# EAGLE board HiHat (EAGLE 6.4)
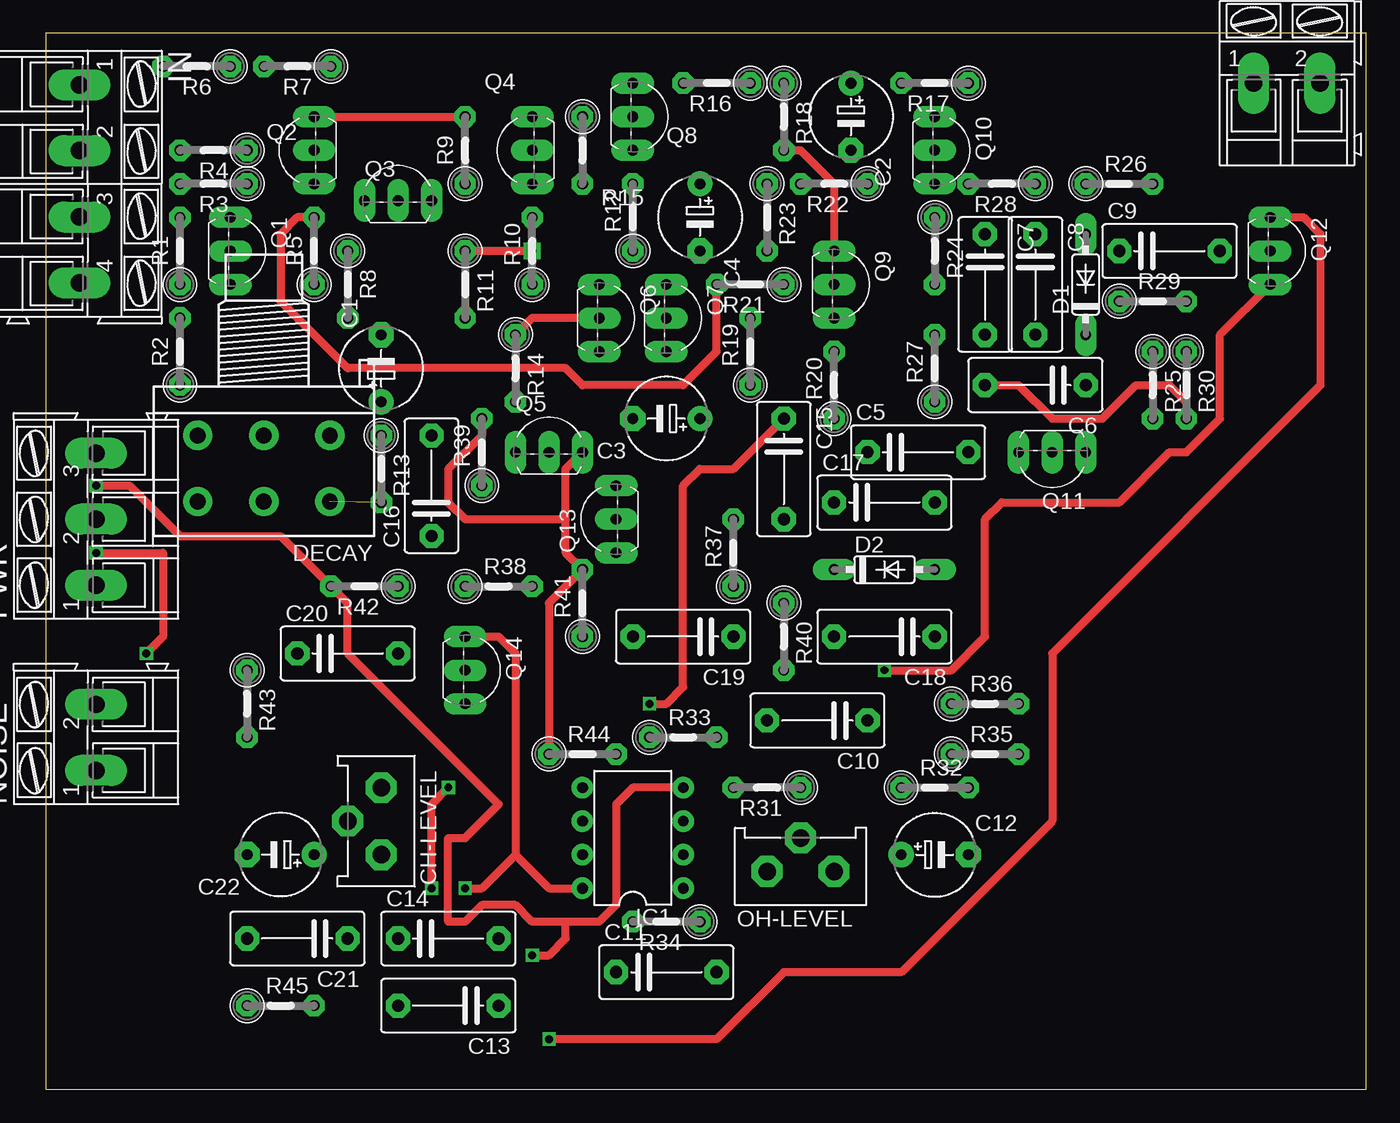
[diagram p0: board, top side]
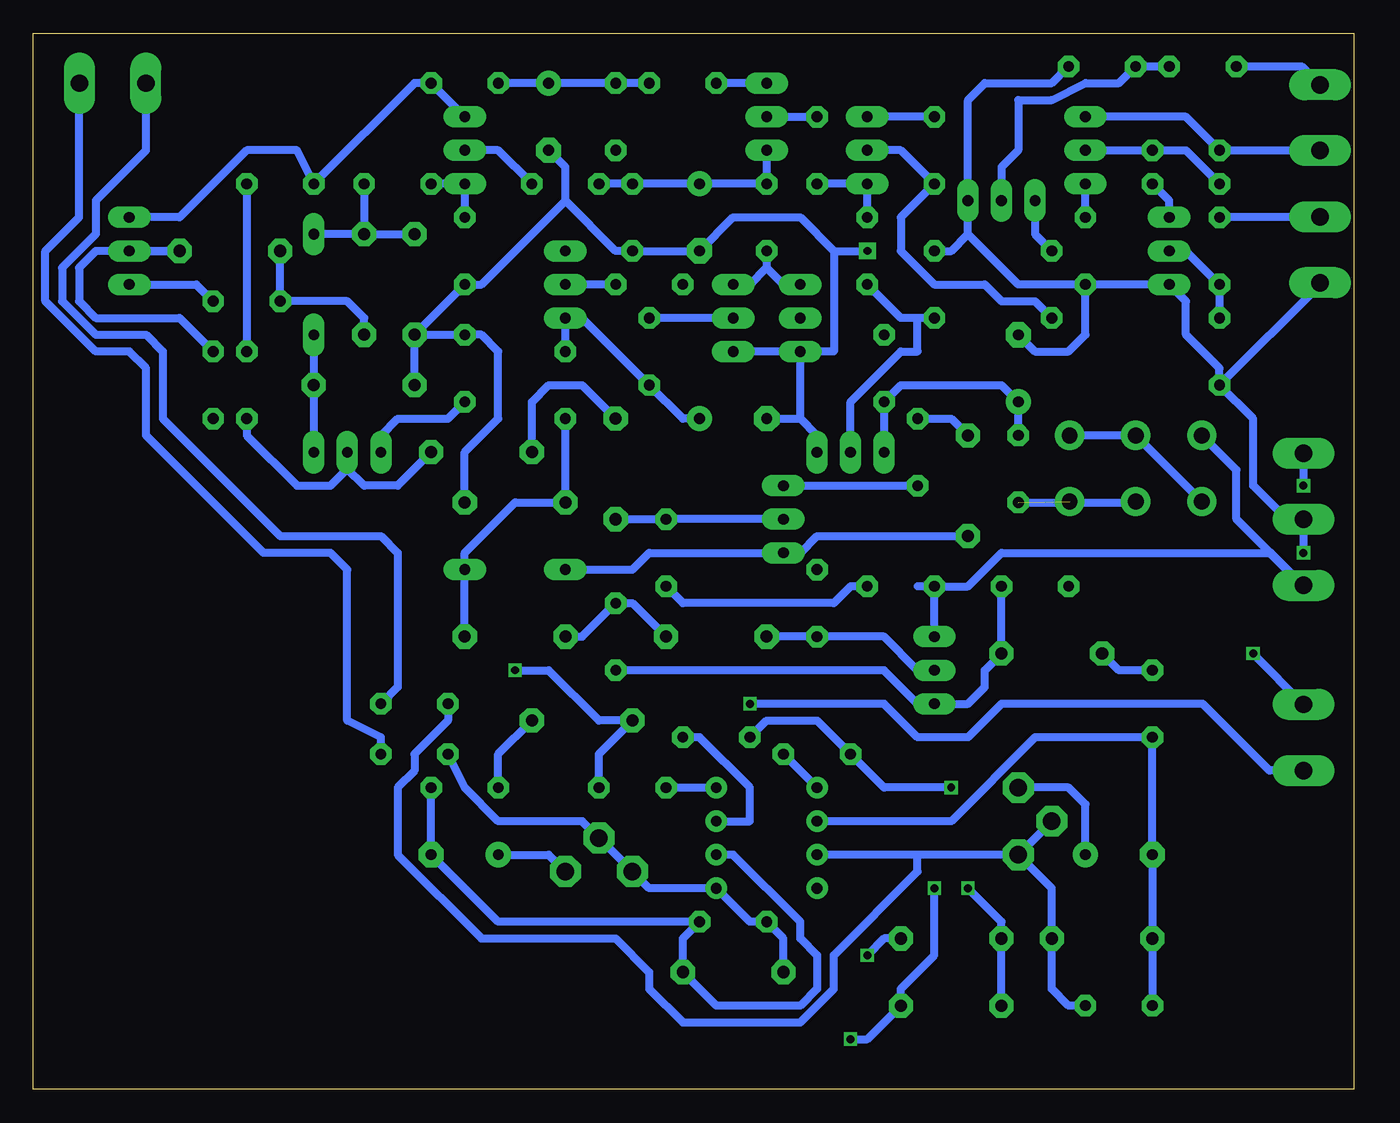
[diagram p1: board, bottom side, seen from below]

Size 100 x 80 mm. Coordinates in mm from the lower left corner, seen from the top.
Outline: 0,0 100,0 100,80 0,80 0,0
Copper layers (1*16): Top 0.035mm / dielectric 1.5mm / Bottom 0.035mm
Design rules "default *": minimum track width 10mil, minimum drill 24mil, track to track 8mil, track to pad 8mil, pad to pad 8mil, via to via 8mil, smd to smd 8mil, copper to edge 40mil, drill to drill 8mil, minimum pad ring 10mil, minimum via ring 8mil, stop-mask expansion 4mil, vias tented up to drill 0mil, thermal gap 10mil

## Footprints (pad centres in the part's own frame; a part is rotated, then mirrored left to right if it is on the bottom)
E5-6 = drill 0.813 pad 1.905: + -2.54,0 | drill 0.813 pad 1.905 octagon: - 2.54,0
C075-042X103 = drill 0.914 octagon: 1 -3.81,0; 2 3.81,0
ECP10P = drill 1.321 octagon: A -2.54,0; E 2.54,0; S 0,2.54
DO35-7 = drill 0.813 long: A 3.81,0; C -3.81,0
3RP/1610G = drill 1.2 pad 2.184: 1-1 -5,0; 1-2 0,0; 1-3 5,0; 2-1 -5,5; 2-2 0,5; 2-3 5,5
DIL08 = drill 0.813 pad 1.27: 1 -3.81,-3.81; 2 -1.27,-3.81; 3 1.27,-3.81; 4 3.81,-3.81; 5 3.81,3.81; 6 1.27,3.81; 7 -1.27,3.81; 8 -3.81,3.81
AK300/4 = drill 1.321 long: 1 -7.493,0; 2 -2.515,0; 3 2.515,0; 4 7.493,0
AK300/2 = drill 1.321 long: 1 -2.515,0; 2 2.489,0
AK300/3 = drill 1.321 long: 1 -5.004,0; 2 0,0; 3 5.004,0
TO92-EBC = drill 0.813 long: B 0,-1.27; C -2.54,-1.27; E 2.54,-1.27
0207/5V = drill 0.813 octagon: 1 -2.54,0; 2 2.54,0

## Placement (x,y rotation side)
C1  10u/16v  [E5-6]  25.4,54.61 90 top
C2  47u/16v  [E5-6]  60.96,73.66 270 top
C3  0.47u  [E5-6]  46.99,50.8 180 top
C4  0.47u  [E5-6]  49.53,66.04 270 top
C5  22n  [C075-042X103]  66.04,48.26 0 top
C6  1.5n  [C075-042X103]  74.93,53.34 180 top
C7  1.5n  [C075-042X103]  71.12,60.96 270 top
C8  1.5n  [C075-042X103]  74.93,60.96 270 top
C9  1.5n  [C075-042X103]  85.09,63.5 0 top
C10  470p  [C075-042X103]  58.42,27.94 180 top
C11  220p  [C075-042X103]  46.99,8.89 0 top
C12  33u/6.3v  [E5-6]  67.31,17.78 0 top
C13  0.1u  [C075-042X103]  30.48,6.35 180 top
C14  0.1u  [C075-042X103]  30.48,11.43 0 top
C15  22n  [C075-042X103]  55.88,46.99 270 top
C16  1.5n  [C075-042X103]  29.21,45.72 90 top
C17  1.5n  [C075-042X103]  63.5,44.45 0 top
C18  1.5n  [C075-042X103]  63.5,34.29 180 top
C19  1.5n  [C075-042X103]  48.26,34.29 180 top
C20  470p  [C075-042X103]  22.86,33.02 0 top
C21  220p  [C075-042X103]  19.05,11.43 180 top
C22  33u/6.3v  [E5-6]  17.78,17.78 180 top
CH-LEVEL  100k  [ECP10P]  25.4,20.32 90 top
D1  1N4148  [DO35-7]  78.74,60.96 90 top
D2  1N4148  [DO35-7]  63.5,39.37 0 top
DECAY  1M  [3RP/1610G]  16.51,49.53 180 top
IC1  TL072P  [DIL08]  44.45,19.05 90 top
IN  OH-TRIG, ACC, CH-TRIG  [AK300/4]  2.54,68.58 270 top
NOISE  [AK300/2]  3.81,26.67 90 top
OH-LEVEL  100k  [ECP10P]  57.15,16.51 0 top
OUT  [AK300/2]  93.98,76.2 0 top
PWR  +15V, GND, -15V  [AK300/3]  3.81,43.18 90 top
Q1  BC546A  [TO92-EBC]  15.24,63.5 270 top
Q2  BC556A  [TO92-EBC]  19.05,71.12 90 top
Q3  BC546A  [TO92-EBC]  26.67,68.58 0 top
Q4  BC556A  [TO92-EBC]  35.56,71.12 90 top
Q5  BC546A  [TO92-EBC]  38.1,49.53 0 top
Q6  BC546A  [TO92-EBC]  43.18,58.42 270 top
Q7  BC546A  [TO92-EBC]  48.26,58.42 270 top
Q8  BC546A  [TO92-EBC]  45.72,73.66 270 top
Q9  BC546A  [TO92-EBC]  60.96,60.96 270 top
Q10  BC546A  [TO92-EBC]  68.58,71.12 270 top
Q11  BC546A  [TO92-EBC]  76.2,46.99 180 top
Q12  BC546A  [TO92-EBC]  93.98,63.5 270 top
Q13  BC546A  [TO92-EBC]  41.91,43.18 90 top
Q14  BC546A  [TO92-EBC]  33.02,31.75 270 top
R1  22k  [0207/5V]  10.16,63.5 90 top
R2  10k  [0207/5V]  10.16,55.88 90 top
R3  22k  [0207/5V]  12.7,68.58 180 top
R4  4.7k  [0207/5V]  12.7,71.12 180 top
R5  22k  [0207/5V]  20.32,63.5 90 top
R6  22k  [0207/5V]  11.43,77.47 180 top
R7  10k  [0207/5V]  19.05,77.47 180 top
R8  22k  [0207/5V]  22.86,60.96 270 top
R9  4.7k  [0207/5V]  31.75,71.12 90 top
R10  22k  [0207/5V]  36.83,63.5 90 top
R11  10k  [0207/5V]  31.75,60.96 270 top
R12  100k  [0207/5V]  44.45,66.04 90 top
R13  100k  [0207/5V]  25.4,46.99 270 top
R14  10k  [0207/5V]  35.56,54.61 270 top
R15  10k  [0207/5V]  40.64,71.12 270 top
R16  470  [0207/5V]  50.8,76.2 180 top
R17  100  [0207/5V]  67.31,76.2 180 top
R18  470  [0207/5V]  55.88,73.66 270 top
R19  330k  [0207/5V]  53.34,55.88 90 top
R20  33k  [0207/5V]  59.69,53.34 90 top
R21  33k  [0207/5V]  53.34,60.96 180 top
R22  33k  [0207/5V]  59.69,68.58 180 top
R23  1M  [0207/5V]  54.61,66.04 270 top
R24  33k  [0207/5V]  67.31,63.5 270 top
R25  1M  [0207/5V]  83.82,53.34 270 top
R26  1M  [0207/5V]  81.28,68.58 0 top
R27  100  [0207/5V]  67.31,54.61 90 top
R28  33k  [0207/5V]  72.39,68.58 180 top
R29  2.7k  [0207/5V]  83.82,59.69 0 top
R30  69k  [0207/5V]  86.36,53.34 270 top
R31  22k  [0207/5V]  54.61,22.86 180 top
R32  39k  [0207/5V]  67.31,22.86 0 top
R33  47k  [0207/5V]  48.26,26.67 0 top
R34  470k  [0207/5V]  46.99,12.7 180 top
R35  1k  [0207/5V]  71.12,25.4 0 top
R36  1k  [0207/5V]  71.12,29.21 0 top
R37  1M  [0207/5V]  52.07,40.64 90 top
R38  1M  [0207/5V]  34.29,38.1 0 top
R39  100  [0207/5V]  33.02,48.26 90 top
R40  2.7k  [0207/5V]  55.88,34.29 270 top
R41  69k  [0207/5V]  40.64,36.83 90 top
R42  22k  [0207/5V]  24.13,38.1 180 top
R43  39k  [0207/5V]  15.24,29.21 270 top
R44  47k  [0207/5V]  40.64,25.4 0 top
R45  470k  [0207/5V]  17.78,6.35 0 top

## Library data of the parts
C1-C22 R1-R45 = rcl
CH-LEVEL DECAY OH-LEVEL = pot
D1 D2 = diode
IC1 = linear
IN NOISE OUT PWR = con-ptr500; OC_FARNELL: unknown; OC_NEWARK: unknown
Q1 Q3 Q5-Q14 = transistor-npn
Q2 Q4 = transistor-pnp

## Nets
+15V: C13.1 DECAY.1-3 IC1.8 PWR.1 Q10.C Q12.C Q14.C R17.1 R26.1 R38.1
-15V: C14.2 IC1.4 PWR.3 R31.2 R42.2
GND: C1.- C2.- C3.- C4.- C6.2 C7.2 C13.2 C14.1 C16.2 C17.2 IN.4 NOISE.2 PWR.2 Q1.E Q3.E Q5.E Q6.E Q7.E R2.1 R5.1 R7.1 R11.1 R23.2 R24.2 R27.2 R30.2 R33.1 R39.2 R41.2 R44.1
N$1: IN.3 R1.2
N$2: Q1.B R1.1 R2.2
N$3: IN.2 Q2.E Q4.E R4.2 R9.2
N$4: Q2.B R3.2 R4.1
N$5: Q1.C R3.1
N$6: Q3.B R6.1 R7.2
N$7: Q2.C R5.2 R21.2
N$8: IN.1 R6.2
N$9: Q3.C R8.1
N$10: Q5.B R10.1 R11.2
N$11: Q4.B R8.2 R9.1
N$12: Q4.C R10.2 R15.2
N$13: DECAY.1-1 DECAY.1-2 DECAY.2-3
N$14: Q6.B R14.1
N$15: Q8.B R15.1
N$16: C2.+ R16.1 R17.2 R18.1
N$17: C1.+ Q5.C R13.1 R14.2
N$18: C4.+ Q8.E R12.2 R22.2 R23.1
N$19: Q6.C Q7.C R12.1
N$20: Q8.C R16.2
N$21: Q7.B R19.2
N$22: C3.+ Q9.E R19.1 R20.2
N$23: R25.1 R26.2
N$24: Q9.B R21.1
N$25: C5.2 Q11.B R25.2
N$26: Q9.C R18.2
N$27: Q10.B R22.1
N$28: Q10.E R24.1 R28.2
N$29: Q11.E R27.1
N$30: C6.1 D1.C Q11.C
N$31: C7.1 C8.1 D1.A R28.1
N$32: C11.2 C12.- IC1.2 R32.2 R34.1
N$33: C8.2 C9.1 R29.1
N$34: C9.2 Q12.B R30.1
N$35: C10.2 Q12.E R29.2 R31.1
N$36: C10.1 R32.1
N$37: IC1.3 R33.2
N$38: OUT.2 R35.2
N$39: C12.+ OH-LEVEL.E
N$40: C11.1 IC1.1 OH-LEVEL.A OH-LEVEL.S R34.2 R35.1
N$41: R37.1 R38.2
N$42: C15.2 Q13.B R37.2
N$43: Q13.E R39.1
N$44: C16.1 D2.C Q13.C
N$45: C17.1 C18.1 D2.A R20.1
N$46: C18.2 C19.1 R40.1
N$47: C19.2 Q14.B R41.1
N$48: C20.2 Q14.E R40.2 R42.1
N$49: C20.1 R43.1
N$50: C5.1 C15.1 NOISE.1
N$51: C21.2 C22.- IC1.6 R43.2 R45.1
N$52: C22.+ CH-LEVEL.E
N$53: C21.1 CH-LEVEL.A CH-LEVEL.S IC1.7 R36.1 R45.2
N$54: IC1.5 R44.2
N$55: OUT.1 R36.2
N$57: DECAY.2-1 DECAY.2-2 R13.2

## Tracks (layer width: path | path; a pad name or v marks a point on that pad's centre or on a via)
+15V  (via drill 0.6)
  Top 0.61: Q14.C 34.29,34.29 35.56,33.02 35.56,17.78 | 35.56,17.78 38.1,15.24 IC1.8 | v31.75,15.24 33.02,15.24 35.56,17.78 | Q12.C 95.25,66.04 96.52,64.77 96.52,53.34 76.2,33.02 76.2,20.32 64.77,8.89 55.88,8.89 50.8,3.81 v38.1,3.81
  Bottom 0.61: DECAY.1-3 8.89,46.91 8.89,43.18 3.89,38.18 PWR.1 6.27,40.64 26.67,40.64 29.21,38.1 R38.1 | Q14.C R38.1 | v31.75,15.24 31.75,10.16 34.29,7.62 C13.1 36.83,3.81 v38.1,3.81 | R38.1 33.02,38.1 | Q10.C R17.1 71.12,76.2 R26.1 80.01,71.12 83.82,71.12 88.9,66.04 Q12.C
  other vias: 92.71,66.04
-15V  (via drill 0.6)
  Top 0.61: v3.81,45.72 6.35,45.72 10.16,41.91 17.78,41.91 R42.2 22.86,36.83 22.86,33.02 34.29,21.59 31.75,19.05 30.48,19.05 30.48,12.7 31.75,12.7 33.02,13.97 35.56,13.97 36.83,12.7 39.37,12.7 | IC1.4 44.45,22.86 43.18,21.59 43.18,13.97 41.91,12.7 39.37,12.7 | v36.83,10.16 38.1,10.16 39.37,11.43 39.37,12.7
  Bottom 0.61: PWR.3 v3.81,45.72 | R31.2 IC1.4 | C14.2 35.56,11.43 v36.83,10.16
GND  (via drill 0.6, 0.6 pad 1.27)
  Top 0.61: v36.83,63.5 R11.1 | C6.2 73.66,53.34 76.2,50.8 80.01,50.8 82.55,53.34 85.09,53.34 86.36,52.07 R30.2 | 39.37,43.18 39.37,40.64 R41.2 38.1,36.83 R44.1 | 39.37,43.18 39.37,46.99 Q5.E | R39.2 33.02,49.53 30.48,46.99 30.48,44.45 31.75,43.18 39.37,43.18 | v3.81,40.64 8.89,40.64 8.89,34.29 v7.62,33.02 | v29.21,15.24 29.21,21.59 v30.48,22.86
  Bottom 0.61: R2.1 2.54,60.96 IN.4 | R2.1 10.16,54.61 12.7,57.15 12.7,59.69 Q1.E R5.1 | R5.1 25.4,60.96 29.21,64.77 | 29.21,64.77 Q3.E 29.21,74.93 27.94,76.2 22.86,76.2 R7.1 | R11.1 30.48,63.5 29.21,64.77 | 59.69,67.31 55.88,63.5 R23.2 C4.- 46.99,66.04 41.91,66.04 39.37,63.5 | 59.69,67.31 59.69,69.85 C2.- | 59.69,67.31 66.04,60.96 R24.2 C7.2 | 39.37,63.5 v36.83,63.5 | 39.37,63.5 39.37,55.88 Q6.E | Q6.E Q7.E | Q5.E 40.64,49.53 41.91,50.8 | 41.91,50.8 Q6.E | C3.- 41.91,50.8 | R5.1 20.32,57.15 21.59,55.88 24.13,55.88 C1.- | C6.2 C7.2 | C7.2 R27.2 66.04,57.15 64.77,55.88 64.77,50.8 67.31,48.26 C17.2 | R2.1 7.62,50.8 7.62,45.72 5.08,43.18 PWR.2 v3.81,40.64 | R39.2 30.48,50.8 C16.2 | R33.1 44.45,27.94 40.64,27.94 R44.1 35.56,22.86 v30.48,22.86 | v7.62,33.02 7.62,32.97 NOISE.2 | v29.21,15.24 26.67,12.7 C14.1 C13.2
N$1
  Bottom 0.61: IN.3 10.13,66.06 R1.2
N$2
  Bottom 0.61: Q1.B 12.7,63.5 R1.1 R2.2
N$3
  Top 0.61: Q2.E R9.2
  Bottom 0.61: IN.2 10.16,71.09 R4.2 12.7,73.66 Q2.E | R9.2 Q4.E
N$4
  Bottom 0.61: Q2.B R4.1 12.7,71.12 R3.2
N$5
  Bottom 0.61: Q1.C 13.97,67.31 R3.1
N$6
  Bottom 0.61: R6.1 R7.2 17.78,76.2 20.32,76.2 22.86,74.93 25.4,74.93 25.4,71.12 26.67,69.85 Q3.B
N$7
  Top 0.61: R5.2 19.05,66.04 17.78,64.77 17.78,59.69 22.86,54.61 39.37,54.61 40.64,53.34 48.26,53.34 50.8,55.88 R21.2
  Bottom 0.61: R5.2 Q2.C
N$8
  Bottom 0.61: R6.2 3.94,77.47 IN.1
N$9
  Bottom 0.61: Q3.C 24.13,64.77 R8.1
N$10
  Bottom 0.61: R11.2 33.02,58.42 | 33.02,58.42 34.29,58.42 R10.1 | Q5.B 38.1,52.07 34.29,55.88 33.02,55.88 33.02,58.42
N$11
  Bottom 0.61: Q4.B 34.29,71.12 R9.1 34.29,66.04 34.29,63.5 31.75,60.96 27.94,60.96 26.67,59.69 24.13,59.69 R8.2
N$12
  Bottom 0.61: R10.2 Q4.C R15.2
N$13
  Bottom 0.61: DECAY.2-3 DECAY.1-2 DECAY.1-1
N$14
  Top 0.61: Q6.B 36.83,58.42 R14.1
N$15
  Bottom 0.61: Q8.B R15.1
N$16
  Bottom 0.61: R16.1 R18.1 C2.+ R17.2
N$17
  Bottom 0.61: R13.1 C1.+ 26.67,53.34 34.29,53.34 R14.2 Q5.C
N$18
  Bottom 0.61: Q8.E R12.2 C4.+ R23.1 R22.2
N$19
  Bottom 0.61: R12.1 44.45,62.23 | 44.45,62.23 43.18,60.96 Q6.C | Q7.C 45.72,60.96 44.45,62.23
N$20
  Bottom 0.61: Q8.C R16.2
N$21
  Bottom 0.61: Q7.B R19.2
N$22
  Bottom 0.61: C3.+ 50.8,50.8 R19.1 58.42,58.42 Q9.E R20.2
N$23
  Bottom 0.61: R26.2 R25.1
N$24
  Bottom 0.61: R21.1 Q9.B
N$25
  Bottom 0.61: R25.2 83.82,49.53 80.01,45.72 77.47,45.72 76.2,46.99 | 76.2,46.99 Q11.B | C5.2 72.39,45.72 74.93,45.72 76.2,46.99
N$26
  Top 0.61: R18.2 57.15,71.12 59.69,68.58 Q9.C
N$27
  Bottom 0.61: R22.1 64.77,71.12 Q10.B
N$28
  Bottom 0.61: R28.2 Q10.E R24.1
N$29
  Bottom 0.61: Q11.E 73.66,49.53 72.39,50.8 68.58,50.8 R27.1
N$30
  Bottom 0.61: D1.C C6.1 Q11.C
N$31
  Bottom 0.61: R28.1 C8.1 | C8.1 C7.1 | C8.1 D1.A
N$32
  Bottom 0.61: R32.2 C12.- 64.77,12.7 R34.1 50.8,11.43 C11.2 48.26,6.35 41.91,6.35 40.64,7.62 40.64,10.16 41.91,11.43 41.91,12.7 46.99,17.78 IC1.2
N$33
  Bottom 0.61: C8.2 74.93,58.42 76.2,59.69 R29.1 C9.1
N$34
  Bottom 0.61: Q12.B C9.2 95.25,63.5 96.52,62.23 96.52,59.69 95.25,58.42 88.9,58.42 R30.1
N$35  (via drill 0.6)
  Top 0.61: v63.5,31.75 68.58,31.75 71.12,34.29 71.12,43.18 72.39,44.45 81.28,44.45 85.09,48.26 86.36,48.26 88.9,50.8 88.9,57.15 Q12.E
  Bottom 0.61: Q12.E 87.63,60.96 R29.2 | v63.5,31.75 60.96,31.75 57.15,27.94 C10.2 57.15,25.4 R31.1
N$36
  Bottom 0.61: R32.1 64.77,25.4 C10.1
N$37
  Bottom 0.61: IC1.3 45.72,20.32 45.72,22.86 49.53,26.67 R33.2
N$38
  Bottom 0.61: R35.2 73.66,26.67 76.2,27.94 76.2,39.37 77.47,40.64 82.55,40.64 91.44,49.53 91.44,54.61 92.71,55.88 95.25,55.88 99.06,59.69 99.06,63.5 96.52,66.04 96.52,76.2 OUT.2
N$39
  Bottom 0.61: C12.+ 60.96,17.78 OH-LEVEL.E
N$40
  Bottom 0.61: C11.1 43.18,11.43 R34.2 45.72,12.7 IC1.1 53.34,15.24 OH-LEVEL.A OH-LEVEL.S 58.42,20.32 64.77,20.32 67.31,22.86 R35.1
N$41
  Bottom 0.61: R38.2 38.1,38.1 39.37,36.83 50.8,36.83 R37.1
N$42
  Bottom 0.61: C15.2 R37.2 Q13.B
N$43
  Bottom 0.61: Q13.E R39.1
N$44
  Bottom 0.61: D2.C 54.61,39.37 53.34,40.64 Q13.C 41.91,40.64 40.64,41.91 C16.1
N$45
  Bottom 0.61: C18.1 D2.A 67.31,40.64 63.5,44.45 C17.1 R20.1
N$46
  Bottom 0.61: C18.2 58.42,34.29 R40.1 54.61,36.83 C19.1
N$47
  Bottom 0.61: Q14.B 33.02,31.75 35.56,34.29 R41.1 C19.2
N$48
  Bottom 0.61: R40.2 35.56,31.75 33.02,29.21 Q14.E 29.21,29.21 27.94,30.48 27.94,31.75 C20.2 R42.1
N$49
  Bottom 0.61: R43.1 17.78,31.75 C20.1
N$50  (via drill 0.6)
  Top 0.61: v45.72,29.21 46.99,29.21 48.26,30.48 48.26,45.72 49.53,46.99 52.07,46.99 C15.1
  Bottom 0.61: C5.1 62.23,52.07 60.96,53.34 58.42,53.34 C15.1 | NOISE.1 6.38,24.16 11.43,29.21 26.67,29.21 29.21,26.67 33.02,26.67 35.56,29.21 v45.72,29.21
N$51
  Bottom 0.61: R45.1 C21.2 C22.- R43.2 24.13,26.67 30.48,20.32 IC1.6
N$52
  Bottom 0.61: C22.+ 20.32,21.59 21.59,22.86 CH-LEVEL.E
N$53
  Bottom 0.61: R45.2 21.59,6.35 22.86,7.62 C21.1 22.86,15.24 CH-LEVEL.A | CH-LEVEL.S CH-LEVEL.A | CH-LEVEL.A 33.02,17.78 | 33.02,17.78 IC1.7 | R36.1 68.58,27.94 71.12,25.4 71.12,24.13 72.39,22.86 72.39,17.78 66.04,11.43 55.88,11.43 53.34,8.89 53.34,7.62 50.8,5.08 41.91,5.08 39.37,7.62 39.37,10.16 33.02,16.51 33.02,17.78
N$54
  Bottom 0.61: IC1.5 R44.2
N$55
  Bottom 0.61: OUT.1 91.47,71.09 95.25,67.31 95.25,64.77 97.79,62.23 97.79,59.69 95.25,57.15 91.44,57.15 90.17,55.88 90.17,50.8 81.28,41.91 73.66,41.91 72.39,40.64 72.39,30.48 R36.2
N$57  (1 unrouted)
  Bottom 0.61: R13.2 16.59,44.45 DECAY.2-2